# EAGLE board weather_4up (EAGLE 9.5.0), part 1 of 5
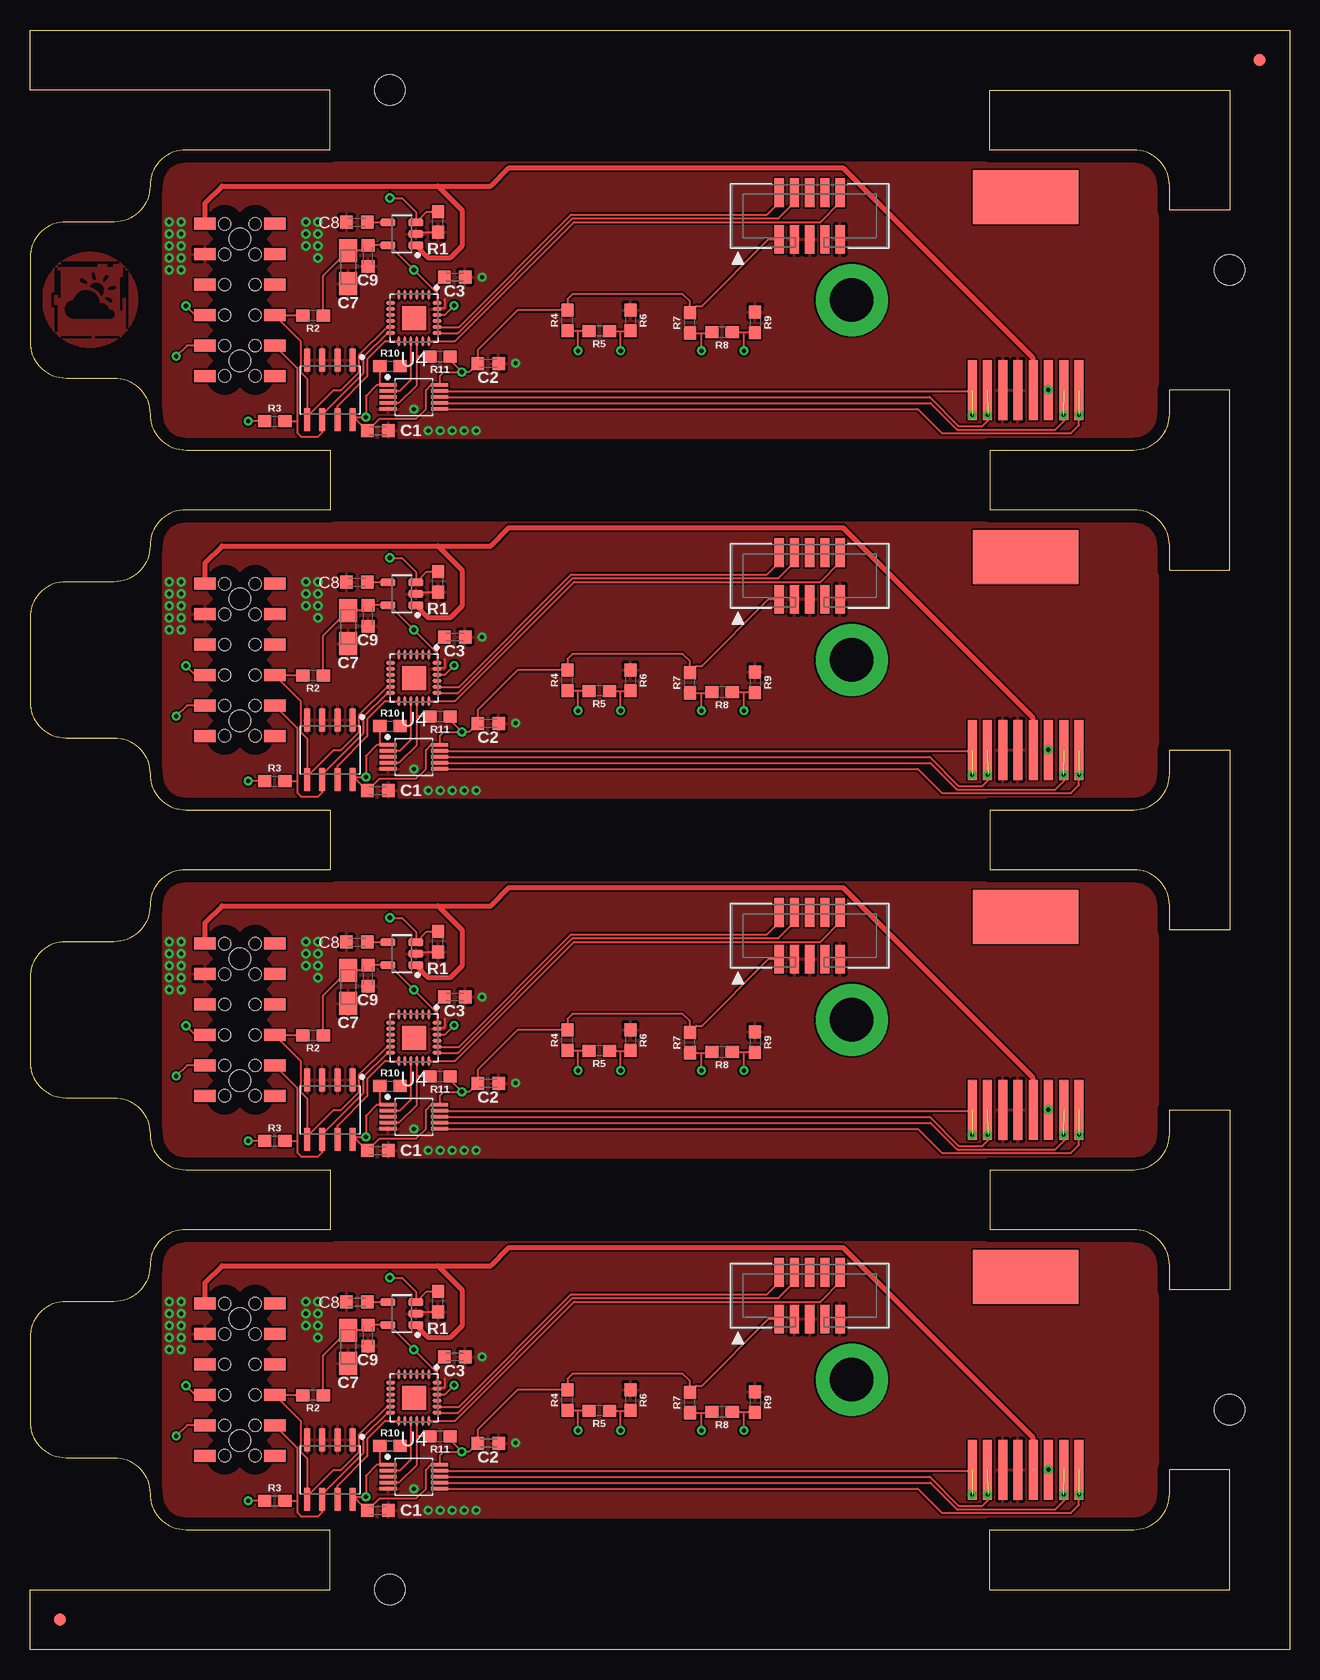
[diagram p0: board, top side]
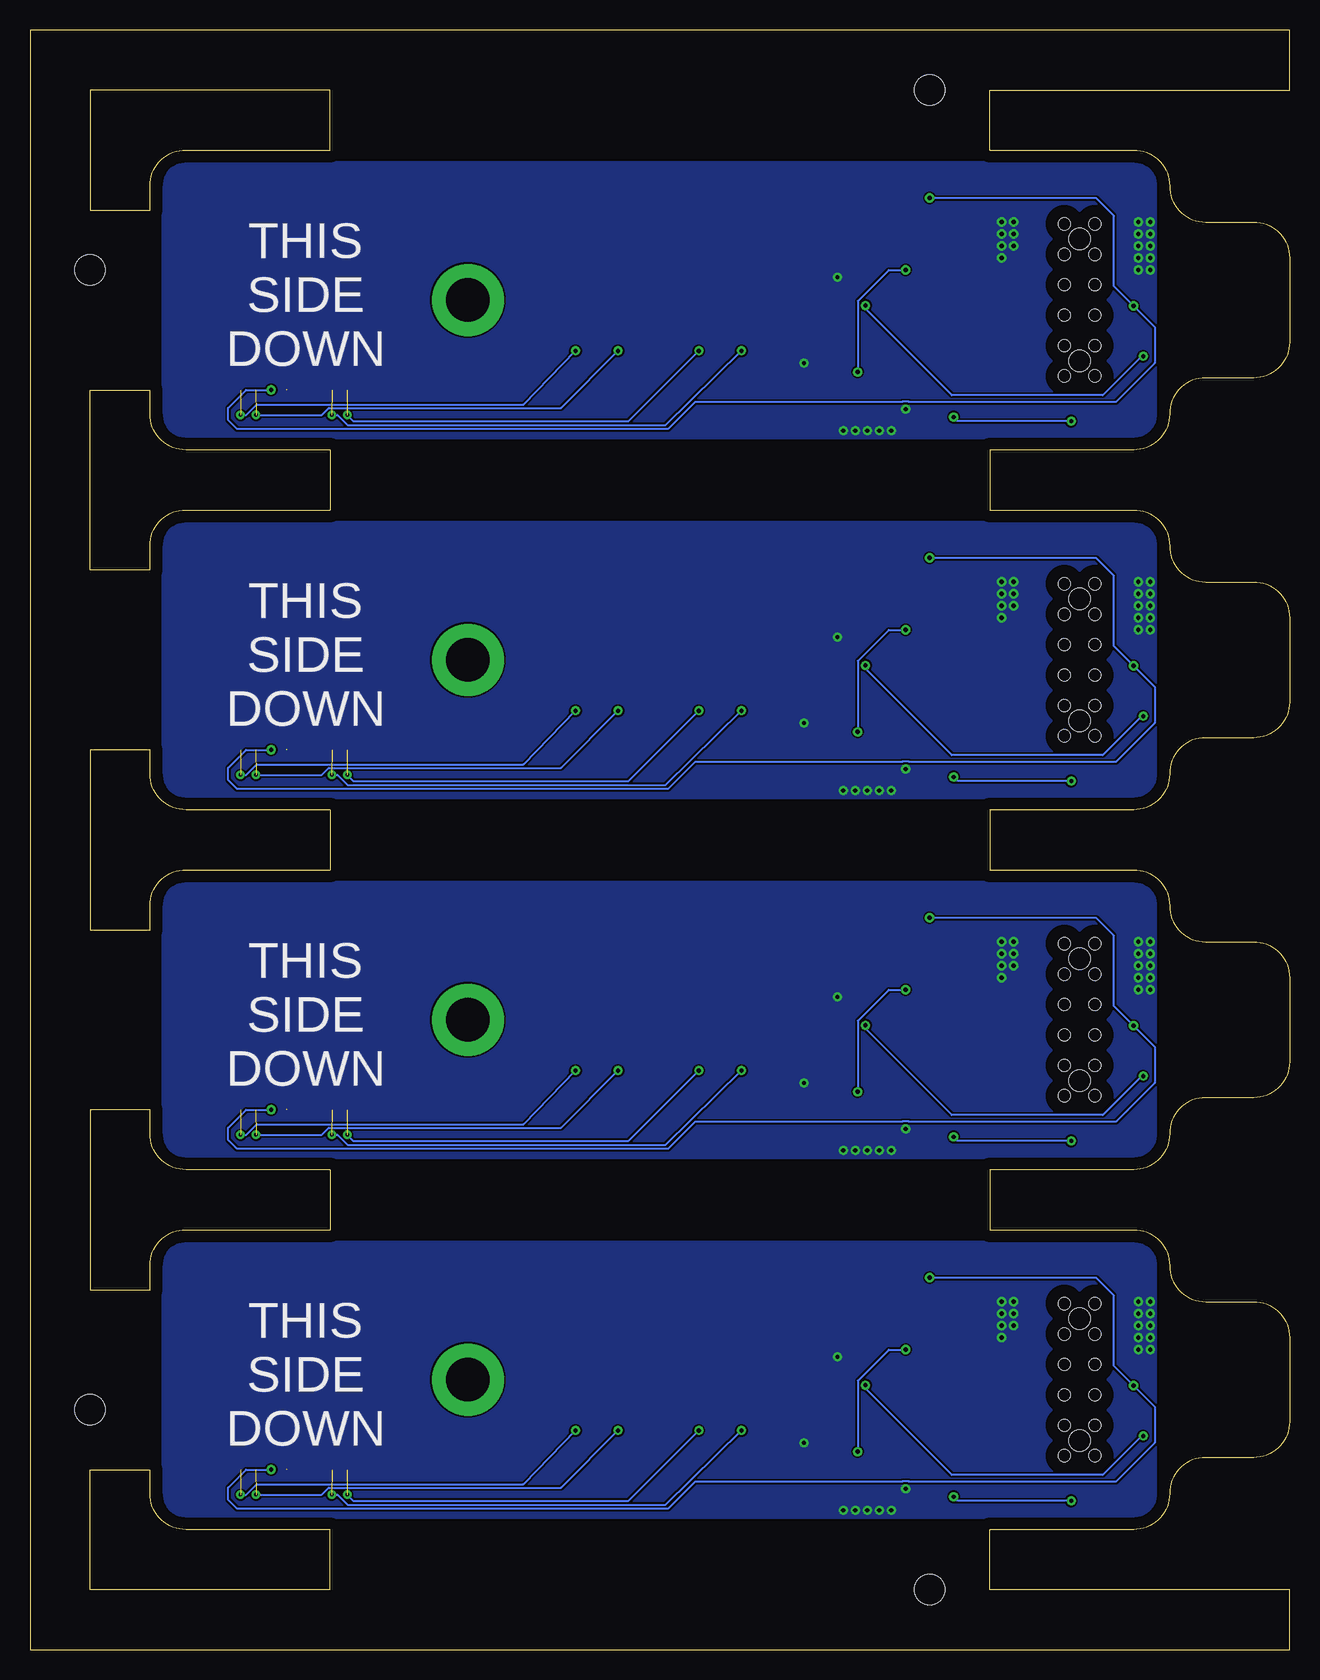
[diagram p1: board, bottom side, seen from below]

Size 105 x 135 mm. Coordinates in mm from the lower left corner, seen from the top.
Outline: 92,10 arc90 95,13 95,15 100,15 100,5 80,5 80,10 92,10
Outline: 95,32 arc90 92,35 80,35 80,40 92,40 arc90 95,43 95,45 100,45 100,30 95,30 95,32
Outline: 10,13 arc90 13,10 25,10 25,5 0,5 0,0 105,0 105,135 0,135 0,130 25,130 25,125 13,125 arc90 10,122 arc-90 7,119 3,119 arc90 0,116 0,109 arc90 3,106 7,106 arc-90 10,103 arc90 13,100 25,100 25,95 13,95 arc90 10,92 arc-90 7,89 3,89 arc90 0,86 0,79 arc90 3,76 7,76 arc-90 10,73 arc90 13,70 25,70 25,65 13,65 arc90 10,62 arc-90 7,59 3,59 arc90 0,56 0,49 arc90 3,46 7,46 arc-90 10,43 arc90 13,40 25,40 25,35 13,35 arc90 10,32 arc-90 7,29 3,29 arc90 0,26 0,19 arc90 3,16 7,16 arc-90 10,13
Outline: 95,62 arc90 92,65 80,65 80,70 92,70 arc90 95,73 95,75 100,75 100,60 95,60 95,62
Outline: 95,92 arc90 92,95 80,95 80,100 92,100 arc90 95,103 95,105 100,105 100,90 95,90 95,92
Outline: 95,122 arc90 92,125 80,125 80,130 100,130 100,120 95,120 95,122
Copper layers (1*16): Top 0.035mm / dielectric 1.5mm / Bottom 0.035mm
Design rules "default *": minimum track width 6mil, minimum drill 0.35mm, track to track 6mil, track to pad 6mil, pad to pad 6mil, via to via 6mil, smd to smd 6mil, copper to edge 40mil, drill to drill 6mil, minimum pad ring 10mil, minimum via ring 8mil, stop-mask expansion 4mil, vias tented up to drill 0.35mm, thermal gap 10mil
Holes 2.54 mm at 30,5 100,20 100,115 30,130

## Footprints (pad centres in the part's own frame; a part is rotated, then mirrored left to right if it is on the bottom)
C0603K = smd 1.05 x 1.08: 1 -0.875,0; 2 0.875,0
A/3216-18R = smd 1.95 x 1.5: + 1.375,0; - -1.375,0
FIDUCIAL_1MM = smd 1 x 1: 1 0,0
M20-7810645 = smd 1.02 x 1.78: P$1 -6.35,-2.91; P$2 -3.81,-2.91; P$3 -1.27,-2.91; P$4 1.27,-2.91; P$5 3.81,-2.91; P$6 6.35,-2.91; P$7 6.35,2.91; P$8 3.81,2.91; P$9 1.27,2.91; P$10 -1.27,2.91; P$11 -3.81,2.91; P$12 -6.35,2.91 | hole 1.02: -6.35,1.27; -3.81,1.27; -1.27,1.27; 1.27,1.27; 3.81,1.27; 6.35,1.27; 6.35,-1.27; 3.81,-1.27; 1.27,-1.27; -1.27,-1.27; -3.81,-1.27; -6.35,-1.27 | hole 1.8: -5.08,0; 5.08,0
85513-5009 = smd 0.76 x 5: 1 4.445,0; 2 3.175,0; 3 1.905,0; 4 0.635,0; 5 -0.635,0; 6 -1.905,0; 7 -3.175,0; 8 -4.445,0 | smd 8.8 x 4.5: P$1 0,16.05
0603 = smd 1.1 x 1: 1 -0.85,0; 2 0.85,0
QFN50P400X400X100-25T200 = smd 0.837 x 0.27: 1 -1.937,1.25; 2 -1.937,0.75; 3 -1.937,0.25; 4 -1.937,-0.25; 5 -1.937,-0.75; 6 -1.937,-1.25; 13 1.937,-1.25; 14 1.937,-0.75; 15 1.937,-0.25; 16 1.937,0.25; 17 1.937,0.75; 18 1.937,1.25 | smd 0.27 x 0.837: 7 -1.25,-1.937; 8 -0.75,-1.937; 9 -0.25,-1.937; 10 0.25,-1.937; 11 0.75,-1.937; 12 1.25,-1.937; 19 1.25,1.937; 20 0.75,1.937; 21 0.25,1.937; 22 -0.25,1.937; 23 -0.75,1.937; 24 -1.25,1.937 | smd 2 x 2: 25 0,0
SOIC127P600X175-8 = smd 1.968 x 0.569: 1 -2.473,1.905; 2 -2.473,0.635; 3 -2.473,-0.635; 4 -2.473,-1.905; 5 2.473,-1.905; 6 2.473,-0.635; 7 2.473,0.635; 8 2.473,1.905
SOP50P490X110-10 = smd 1.438 x 0.297: 1 -2.145,1; 2 -2.145,0.5; 3 -2.145,0; 4 -2.145,-0.5; 5 -2.145,-1; 6 2.145,-1; 7 2.145,-0.5; 8 2.145,0; 9 2.145,0.5; 10 2.145,1
SOT95P280X145-5 = smd 1.262 x 0.609: 1 -1.175,0.95; 2 -1.175,0; 3 -1.175,-0.95; 4 1.175,-0.95; 5 1.175,0.95
2X05_1.27MM_BOX_NOPOSTS = smd 0.76 x 2.4: 1 -2.54,-1.95; 2 -2.54,1.95; 3 -1.27,-1.95; 4 -1.27,1.95; 5 0,-1.95; 6 0,1.95; 7 1.27,-1.95; 8 1.27,1.95; 9 2.54,-1.95; 10 2.54,1.95

## Placement (x,y rotation side)
C1  .1uf  [C0603K]  29,101.6 0 top
C2  .1uf  [C0603K]  38.2,107.2 0 top
C3  .1uf  [C0603K]  35.4,114.4 0 top
C4  6.8uf  [A/3216-18R]  26.54,85.23 90 top
C5  [C0603K]  27.25,88.97 180 top
C6  .1uf  [C0603K]  28.17,86.17 270 top
C7  6.8uf  [A/3216-18R]  26.54,115.23 90 top
C8  [C0603K]  27.25,118.97 180 top
C9  .1uf  [C0603K]  28.17,116.17 270 top
C10  .1uf  [C0603K]  29,71.6 0 top
C11  .1uf  [C0603K]  38.2,77.2 0 top
C12  .1uf  [C0603K]  35.4,84.4 0 top
C13  6.8uf  [A/3216-18R]  26.54,55.23 90 top
C14  [C0603K]  27.25,58.97 180 top
C15  .1uf  [C0603K]  28.17,56.17 270 top
C16  .1uf  [C0603K]  29,41.6 0 top
C17  .1uf  [C0603K]  38.2,47.2 0 top
C18  .1uf  [C0603K]  35.4,54.4 0 top
C19  6.8uf  [A/3216-18R]  26.54,25.23 90 top
C20  [C0603K]  27.25,28.97 180 top
C21  .1uf  [C0603K]  28.17,26.18 270 top
C22  .1uf  [C0603K]  29,11.6 0 top
C23  .1uf  [C0603K]  38.2,17.2 0 top
C24  .1uf  [C0603K]  35.4,24.4 0 top
FID1  FIDUCIAL_1MM  [FIDUCIAL_1MM]  102.5,132.5 0 top
FID13  FIDUCIAL_1MM  [FIDUCIAL_1MM]  2.5,2.5 0 top
J1  2X6-HEADERS  [M20-7810645]  17.5,112.5 90 top
J2  95501-6889VERT  [85513-5009]  83,105 0 top
J3  2X6-HEADERS  [M20-7810645]  17.5,82.5 90 top
J4  95501-6889VERT  [85513-5009]  83,75 0 top
J5  2X6-HEADERS  [M20-7810645]  17.5,52.5 90 top
J6  95501-6889VERT  [85513-5009]  83,45 0 top
J7  2X6-HEADERS  [M20-7810645]  17.5,22.5 90 top
J8  95501-6889VERT  [85513-5009]  83,15 0 top
R1  100k  [0603]  34,119 90 top
R2  4.7k  [0603]  23.6,111.2 180 top
R3  4.7k  [0603]  20.4,102.4 0 top
R4  330  [0603]  44.8,110.8 90 top
R5  100  [0603]  47.46,109.89 180 top
R6  300  [0603]  50.06,110.79 270 top
R7  330  [0603]  55,110.6 90 top
R8  100  [0603]  57.69,109.79 180 top
R9  300  [0603]  60.45,110.62 270 top
R10  4.7k  [0603]  30.02,106.98 0 top
R11  4.7k  [0603]  34.18,107.76 180 top
R12  100k  [0603]  34,89 90 top
R13  4.7k  [0603]  23.6,81.2 180 top
R14  4.7k  [0603]  20.4,72.4 0 top
R15  330  [0603]  44.8,80.8 90 top
R16  100  [0603]  47.46,79.89 180 top
R17  300  [0603]  50.06,80.79 270 top
R18  330  [0603]  55,80.6 90 top
R19  100  [0603]  57.69,79.79 180 top
R20  300  [0603]  60.45,80.62 270 top
R21  4.7k  [0603]  30.02,76.98 0 top
R22  4.7k  [0603]  34.18,77.76 180 top
R23  100k  [0603]  34,59 90 top
R24  4.7k  [0603]  23.6,51.2 180 top
R25  4.7k  [0603]  20.4,42.4 0 top
R26  330  [0603]  44.8,50.8 90 top
R27  100  [0603]  47.46,49.9 180 top
R28  300  [0603]  50.06,50.79 270 top
R29  330  [0603]  55,50.6 90 top
R30  100  [0603]  57.69,49.79 180 top
R31  300  [0603]  60.45,50.62 270 top
R32  4.7k  [0603]  30.02,46.98 0 top
R33  4.7k  [0603]  34.18,47.76 180 top
R34  100k  [0603]  34,29 90 top
R35  4.7k  [0603]  23.6,21.2 180 top
R36  4.7k  [0603]  20.4,12.4 0 top
R37  330  [0603]  44.8,20.8 90 top
R38  100  [0603]  47.46,19.89 180 top
R39  300  [0603]  50.06,20.79 270 top
R40  330  [0603]  55,20.6 90 top
R41  100  [0603]  57.69,19.79 180 top
R42  300  [0603]  60.45,20.62 270 top
R43  4.7k  [0603]  30.02,16.98 0 top
R44  4.7k  [0603]  34.18,17.76 180 top
U1  ATSAMD09  [QFN50P400X400X100-25T200]  32,81 270 top
U2  ATSAMD09  [QFN50P400X400X100-25T200]  32,111 270 top
U3  M24C02-WMN6TP  [SOIC127P600X175-8]  25,105 270 top
U4  PCA9615  [SOP50P490X110-10]  32,104.4 0 top
U5  M24C02-WMN6TP  [SOIC127P600X175-8]  25,75 270 top
U6  PCA9615  [SOP50P490X110-10]  32,74.4 0 top
U7  ATSAMD09  [QFN50P400X400X100-25T200]  32,51 270 top
U8  M24C02-WMN6TP  [SOIC127P600X175-8]  25,45 270 top
U9  PCA9615  [SOP50P490X110-10]  32,44.4 0 top
U10  ATSAMD09  [QFN50P400X400X100-25T200]  32,21 270 top
U11  M24C02-WMN6TP  [SOIC127P600X175-8]  25,15 270 top
U12  PCA9615  [SOP50P490X110-10]  32,14.4 0 top
U$1  MIC5219-3.3YM5-TR  [SOT95P280X145-5]  31,88 180 top
U$2  MIC5219-3.3YM5-TR  [SOT95P280X145-5]  31,58 180 top
U$3  MIC5219-3.3YM5-TR  [SOT95P280X145-5]  31,28 180 top
U$4  MIC5219-3.3YM5-TR  [SOT95P280X145-5]  31,118 180 top
X1  [2X05_1.27MM_BOX_NOPOSTS]  65,119.5 0 top
X2  [2X05_1.27MM_BOX_NOPOSTS]  65,89.5 0 top
X3  [2X05_1.27MM_BOX_NOPOSTS]  65,59.5 0 top
X4  [2X05_1.27MM_BOX_NOPOSTS]  65,29.5 0 top

## Library data of the parts
C1-C24 = rcl; SPICEPREFIX: C
FID1 FID13 = microbuilder; BOM: EXCLUDE
J1-J8 U1-U12 U$1-U$4 = Conservify
R1-R44 = SparkFun-Resistors; PROD_ID: RES-07828
X1-X4 = microbuilder

## Nets
3V1: C4.+ C6.1 C10.1 C11.1 C12.1 R13.1 R14.1 R15.2 R18.2 R21.1 R22.1 U1.24 U5.8 U6.1 U6.10 U$1.5 X2.1
3V2: C13.+ C15.1 C16.1 C17.1 C18.1 R24.1 R25.1 R26.2 R29.2 R32.1 R33.1 U7.24 U8.8 U9.1 U9.10 U$2.5 X3.1
3V3: C1.1 C2.1 C3.1 C7.+ C9.1 R2.1 R3.1 R4.2 R7.2 R10.1 R11.1 U2.24 U3.8 U4.1 U4.10 U$4.5 X1.1
3V4: C19.+ C21.1 C22.1 C23.1 C24.1 R35.1 R36.1 R37.2 R40.2 R43.1 R44.1 U10.24 U11.8 U12.1 U12.10 U$3.5 X4.1
EN: U4.3
EN1: U6.3
EN2: U9.3
EN3: U12.3
ENABLE: J1.P$10 J2.3 R1.2 U$4.3
ENABLE1: J3.P$10 J4.3 R12.2 U$1.3
ENABLE2: J5.P$10 J6.3 R23.2 U$2.3
ENABLE3: J7.P$10 J8.3 R34.2 U$3.3
G1: J1.P$11 U2.22
G2: J1.P$12
G3: J3.P$11 U1.22
G4: J3.P$12
G5: J5.P$11 U7.22
G6: J5.P$12
G7: J7.P$11 U10.22
G8: J7.P$12
GND: C1.2 C2.2 C3.2 C7.- C8.2 C9.2 J1.P$8 J2.5 J2.6 R1.1 R6.1 R9.1 U2.23 U3.1 U3.2 U3.3 U3.4 U4.5 U$4.2 X1.3 X1.5 X1.9
GND2: C4.- C5.2 C6.2 C10.2 C11.2 C12.2 J3.P$8 J4.5 J4.6 R12.1 R17.1 R20.1 U1.23 U5.1 U5.2 U5.3 U5.4 U6.5 U$1.2 X2.3 X2.5 X2.9
GND4: C13.- C14.2 C15.2 C16.2 C17.2 C18.2 J5.P$8 J6.5 J6.6 R23.1 R28.1 R31.1 U7.23 U8.1 U8.2 U8.3 U8.4 U9.5 U$2.2 X3.3 X3.5 X3.9
GND6: C19.- C20.2 C21.2 C22.2 C23.2 C24.2 J7.P$8 J8.5 J8.6 R34.1 R39.1 R42.1 U10.23 U11.1 U11.2 U11.3 U11.4 U12.5 U$3.2 X4.3 X4.5 X4.9
IN3V1: J3.P$9
IN3V2: J5.P$9
IN3V3: J1.P$9
IN3V4: J7.P$9
KEY: X1.7
KEY1: X2.7
KEY2: X3.7
KEY3: X4.7
LCL-M: J2.1 R8.1 R9.2 U4.6
LCL-M1: J4.1 R19.1 R20.2 U6.6
LCL-M2: J6.1 R30.1 R31.2 U9.6
LCL-M3: J8.1 R41.1 R42.2 U12.6
LCL-P: J2.2 R7.1 R8.2 U4.7
LCL-P1: J4.2 R18.1 R19.2 U6.7
LCL-P2: J6.2 R29.1 R30.2 U9.7
LCL-P3: J8.2 R40.1 R41.2 U12.7
LDA-M: J2.8 R5.1 R6.2 U4.9
LDA-M1: J4.8 R16.1 R17.2 U6.9
LDA-M2: J6.8 R27.1 R28.2 U9.9
LDA-M3: J8.8 R38.1 R39.2 U12.9
LDA-P: J2.7 R4.1 R5.2 U4.8
LDA-P1: J4.7 R15.1 R16.2 U6.8
LDA-P2: J6.7 R26.1 R27.2 U9.8
LDA-P3: J8.7 R37.1 R38.2 U12.8
MISO: J1.P$4
MISO1: J3.P$4
MISO2: J5.P$4
MISO3: J7.P$4
MOSI: J1.P$5
MOSI1: J3.P$5
MOSI2: J5.P$5
MOSI3: J7.P$5
N$3: C5.1 U$1.4
N$5: C14.1 U$2.4
N$6: C8.1 U$4.4
N$8: C20.1 U$3.4
NC: J1.P$1
NC1: J3.P$1
NC2: J5.P$1
NC3: J7.P$1
RESET: U2.18 X1.10
RESET1: U1.18 X2.10
RESET2: U7.18 X3.10
RESET3: U10.18 X4.10
SCK: J1.P$6
SCK1: J3.P$6
SCK2: J5.P$6
SCK3: J7.P$6
SCL: J1.P$2 R3.2 U2.12 U3.6
SCL1: J3.P$2 R14.2 U1.12 U5.6
SCL2: J5.P$2 R25.2 U7.12 U8.6
SCL3: J7.P$2 R36.2 U10.12 U11.6
SDA: J1.P$3 R2.2 U2.11 U3.5
SDA1: J3.P$3 R13.2 U1.11 U5.5
SDA2: J5.P$3 R24.2 U7.11 U8.5
SDA3: J7.P$3 R35.2 U10.11 U11.5
SENSE-SCL: R11.2 U2.16 U4.4
SENSE-SCL1: R22.2 U1.16 U6.4
SENSE-SCL2: R33.2 U7.16 U9.4
SENSE-SCL3: R44.2 U10.16 U12.4
SENSE-SDA: R10.2 U2.15 U4.2
SENSE-SDA1: R21.2 U1.15 U6.2
SENSE-SDA2: R32.2 U7.15 U9.2
SENSE-SDA3: R43.2 U10.15 U12.2
SWCLK: U2.19 X1.4
SWCLK1: U1.19 X2.4
SWCLK2: U7.19 X3.4
SWCLK3: U10.19 X4.4
SWDIO: U2.20 X1.2
SWDIO1: U1.20 X2.2
SWDIO2: U7.20 X3.2
SWDIO3: U10.20 X4.2
SWO: X1.6
SWO1: X2.6
SWO2: X3.6
SWO3: X4.6
TDI: X1.8
TDI1: X2.8
TDI2: X3.8
TDI3: X4.8
UNREG: J1.P$7 J2.4 U$4.1
UNREG1: J3.P$7 J4.4 U$1.1
UNREG2: J5.P$7 J6.4 U$2.1
UNREG3: J7.P$7 J8.4 U$3.1
WC: U2.13 U3.7
WC1: U1.13 U5.7
WC2: U7.13 U8.7
WC3: U10.13 U11.7

## Tracks (layer width: path | path; a pad name or v marks a point on that pad's centre or on a via)
3V1  (via drill 0.35)
  Top 0.152: 33.94,83.06 v32,85 29.95,87.05 U$1.5 C6.1 27.73,86.61 C4.+ 24.45,84.52 R13.1 | 33.94,83.06 U1.24 | C12.1 33.94,83.81 33.94,83.06 | v36,76.49 36.62,76.49 C11.1 37.33,78.33 40.65,81.65 R15.2 44.8,82.58 45.23,83 54.4,83 55,82.4 R18.2 55.55,82 56,82 61.55,87.55 X2.1 | 27.2,72.53 C10.1 29.12,72.6 32.2,72.6 33,73.4 33,75 33.4,75.4 U6.10 34.2,75.45 34.2,76.2 34.49,76.49 v36,76.49 | 27.2,72.53 27,72.73 v28,72.73 28,74.49 28.91,75.4 29.22,75.4 | 27.2,72.53 U5.8 | R14.1 v18.2,72.4 | 29.22,75.4 U6.1 | R22.1 35.03,77.46 v36,76.49 | R21.1 29.17,75.46 29.22,75.4
  Bottom 0.152: v36,76.49 36,82.4 33.4,85 v32,85 | v18.2,72.4 27.67,72.4 v28,72.73
3V2  (via drill 0.35)
  Top 0.152: 33.94,53.06 v32,55 29.95,57.05 U$2.5 C15.1 27.73,56.61 C13.+ 24.45,54.52 R24.1 | 33.94,53.06 U7.24 | C18.1 33.94,53.81 33.94,53.06 | v36,46.49 36.62,46.49 C17.1 37.33,48.33 40.65,51.65 R26.2 44.8,52.58 45.23,53 54.4,53 55,52.4 R29.2 55.55,52 56,52 61.55,57.55 X3.1 | 27.2,42.53 C16.1 29.12,42.6 32.2,42.6 33,43.4 33,45 33.4,45.4 U9.10 34.2,45.45 34.2,46.2 34.49,46.49 v36,46.49 | 27.2,42.53 27,42.73 v28,42.73 28,44.49 28.91,45.4 29.22,45.4 | 27.2,42.53 U8.8 | R25.1 v18.2,42.4 | 29.22,45.4 U9.1 | R33.1 35.03,47.46 v36,46.49 | R32.1 29.17,45.46 29.22,45.4
  Bottom 0.152: v36,46.49 36,52.4 33.4,55 v32,55 | v18.2,42.4 27.67,42.4 v28,42.73
3V3  (via drill 0.35)
  Top 0.152: 33.94,113.06 v32,115 29.95,117.05 U$4.5 C9.1 27.73,116.61 C7.+ 24.45,114.52 R2.1 | 33.94,113.06 U2.24 | C3.1 33.94,113.81 33.94,113.06 | v36,106.49 36.62,106.49 C2.1 37.33,108.33 40.65,111.65 R4.2 44.8,112.58 45.23,113 54.4,113 55,112.4 R7.2 55.55,112 56,112 61.55,117.55 X1.1 | 27.2,102.53 C1.1 29.12,102.6 32.2,102.6 33,103.4 33,105 33.4,105.4 U4.10 34.2,105.45 34.2,106.2 34.49,106.49 v36,106.49 | 27.2,102.53 27,102.73 v28,102.73 28,104.49 28.91,105.4 29.22,105.4 | 27.2,102.53 U3.8 | R3.1 v18.2,102.4 | 29.22,105.4 U4.1 | R11.1 35.03,107.46 v36,106.49 | R10.1 29.17,105.46 29.22,105.4
  Bottom 0.152: v36,106.49 36,112.4 33.4,115 v32,115 | v18.2,102.4 27.67,102.4 v28,102.73
3V4  (via drill 0.35)
  Top 0.152: 33.94,23.06 v32,25 29.95,27.05 U$3.5 C21.1 27.73,26.61 C19.+ 24.45,24.52 R35.1 | 33.94,23.06 U10.24 | C24.1 33.94,23.81 33.94,23.06 | v36,16.49 36.62,16.49 C23.1 37.33,18.32 40.65,21.65 R37.2 44.8,22.57 45.23,23 54.4,23 55,22.4 R40.2 55.55,22 56,22 61.55,27.55 X4.1 | 27.2,12.53 C22.1 29.12,12.6 32.2,12.6 33,13.4 33,15 33.4,15.4 U12.10 34.2,15.46 34.2,16.2 34.49,16.49 v36,16.49 | 27.2,12.53 27,12.73 v28,12.73 28,14.49 28.91,15.4 29.22,15.4 | 27.2,12.53 U11.8 | R36.1 v18.2,12.4 | 29.22,15.4 U12.1 | R44.1 35.03,17.46 v36,16.49 | R43.1 29.17,15.46 29.22,15.4
  Bottom 0.152: v36,16.49 36,22.4 33.4,25 v32,25 | v18.2,12.4 27.67,12.4 v28,12.73
ENABLE  (via drill 0.35)
  Top 0.152: R1.2 33.08,119.85 U$4.3 32.17,119.83 31,121 v30,121 | J1.P$10 13.77,111.23 v13,112
  Bottom 0.152: v30,121 16.11,121 14.63,119.51 14.63,113.63 v13,112 11.25,110.25 11.25,107.25 14.5,104 31.74,104 31.75,104.01 32.25,104.01 32.26,104 49.55,104 51.8,101.75 87.75,101.75 88.5,102.5 88.5,103.5 87,105 J2.3
  other vias: 84.91,105
ENABLE1  (via drill 0.35)
  Top 0.152: R12.2 33.08,89.85 U$1.3 32.17,89.83 31,91 v30,91 | J3.P$10 13.77,81.23 v13,82
  Bottom 0.152: v30,91 16.11,91 14.63,89.51 14.63,83.63 v13,82 11.25,80.25 11.25,77.25 14.5,74 31.74,74 31.75,74.01 32.25,74.01 32.26,74 49.55,74 51.8,71.75 87.75,71.75 88.5,72.5 88.5,73.5 87,75 J4.3
  other vias: 84.91,75
ENABLE2  (via drill 0.35)
  Top 0.152: R23.2 33.08,59.85 U$2.3 32.17,59.83 31,61 v30,61 | J5.P$10 13.77,51.23 v13,52
  Bottom 0.152: v30,61 16.11,61 14.63,59.51 14.63,53.63 v13,52 11.25,50.25 11.25,47.25 14.5,44 31.74,44 31.75,44.01 32.25,44.01 32.26,44 49.55,44 51.8,41.75 87.75,41.75 88.5,42.5 88.5,43.5 87,45 J6.3
  other vias: 84.91,45
ENABLE3  (via drill 0.35)
  Top 0.152: R34.2 33.08,29.85 U$3.3 32.17,29.82 31,31 v30,31 | J7.P$10 13.77,21.23 v13,22
  Bottom 0.152: v30,31 16.11,31 14.63,29.51 14.63,23.63 v13,22 11.25,20.25 11.25,17.25 14.5,14 31.74,14 31.75,14.01 32.25,14.01 32.26,14 49.55,14 51.8,11.75 87.75,11.75 88.5,12.5 88.5,13.5 87,15 J8.3
  other vias: 84.91,15
G1  (via drill 0.35)
  Top 0.152: J1.P$11 13.09,108.69 v12.2,107.8 | v35.36,112.04 34.58,111.25 U2.22
  Bottom 0.152: v12.2,107.8 12.31,107.8 15.57,104.55 28.15,104.55 35.36,111.76 v35.36,112.04
G3  (via drill 0.35)
  Top 0.152: J3.P$11 13.09,78.69 v12.2,77.8 | v35.36,82.04 34.58,81.25 U1.22
  Bottom 0.152: v12.2,77.8 12.31,77.8 15.57,74.55 28.15,74.55 35.36,81.76 v35.36,82.04
G5  (via drill 0.35)
  Top 0.152: J5.P$11 13.09,48.69 v12.2,47.8 | v35.36,52.04 34.58,51.25 U7.22
  Bottom 0.152: v12.2,47.8 12.31,47.8 15.57,44.55 28.15,44.55 35.36,51.76 v35.36,52.04
G7  (via drill 0.35)
  Top 0.152: J7.P$11 13.09,18.69 v12.2,17.8 | v35.36,22.04 34.58,21.25 U10.22
  Bottom 0.152: v12.2,17.8 12.31,17.8 15.57,14.55 28.15,14.55 35.36,21.76 v35.36,22.04
GND  (via drill 0.35)
  Top 0.152: U$4.2 32.33,118.15 R1.1 | U2.23 33.99,111.8 34.48,111.8 34.6,111.92 34.6,112.6
  other vias: 23,119 24,119 24,118 23,118 24,117 23,117 24,116 11.6,119 11.6,118 11.6,117 11.6,116 11.6,115 12.6,119 12.6,118 12.6,117 12.6,116 12.6,115 32,103.4 37.2,101.6 33.2,101.6 34.2,101.6 35.2,101.6 36.2,101.6 37.68,114.39 40.47,107.22
  pour Top: 11.1,124 94,124 94,101 11.1,101
  pour Bottom: 11.1,124 94,124 94,101 11.1,101
GND1
  pour Top (rank 3): 6.94,114.7 6.95,114.44 7.2,114.44 7.2,114.7
  pour Top (rank 3): 6.94,114.19 6.95,113.93 7.2,113.93 7.2,114.19
  pour Top (rank 3): 7.11,113.67 7.14,113.64 7.16,113.62 7.18,113.58 7.18,113.55 7.18,113.51 7.18,113.48 7.17,113.46 7.16,113.44 7.14,113.41 7.2,113.41 7.2,113.67 7.11,113.67
  pour Top (rank 3): 6.94,114.45 6.95,114.19 7.2,114.19 7.2,114.44
  pour Top (rank 3): 6.94,113.7 6.97,113.7 6.99,113.71 7.03,113.7 7.05,113.7 7.07,113.69 7.09,113.69 7.11,113.67 7.2,113.67 7.2,113.93 6.95,113.93
  pour Top (rank 3): 2.55,112.64 2.55,112.38 2.81,112.38 2.81,112.64
  pour Top (rank 3): 5.14,110.05 5.14,109.79 5.39,109.79 5.39,110.05
  pour Top (rank 3): 2.55,111.34 2.55,111.08 2.81,111.08 2.81,111.34
  pour Top (rank 3): 3.58,114.96 3.59,114.7 3.84,114.7 3.84,114.96
  pour Top (rank 3): 3.84,114.96 3.84,114.7 4.1,114.7 4.1,114.96
  pour Top (rank 3): 2.55,111.6 2.55,111.34 2.81,111.34 2.81,111.6
  pour Top (rank 3): 2.55,111.86 2.55,111.6 2.81,111.6 2.81,111.86
  pour Top (rank 3): 3.07,114.96 3.07,114.7 3.33,114.7 3.33,114.96
  pour Top (rank 3): 4.1,114.96 4.1,114.7 4.36,114.7 4.36,114.96
  pour Top (rank 3): 3.33,114.96 3.33,114.7 3.58,114.7 3.58,114.96
  pour Top (rank 3): 2.55,112.38 2.55,112.12 2.81,112.12 2.81,112.38
  pour Top (rank 3): 2.55,112.12 2.55,111.86 2.81,111.86 2.81,112.12
  pour Top (rank 3): 4.36,114.96 4.36,114.7 4.62,114.7 4.62,114.96
  pour Top (rank 3): 5.65,114.96 5.65,114.7 5.91,114.7 5.91,114.96
  pour Top (rank 3): 5.91,114.96 5.91,114.7 6.17,114.7 6.17,114.96
  pour Top (rank 3): 6.17,114.96 6.17,114.7 6.43,114.7 6.43,114.96
  pour Top (rank 3): 6.69,114.96 6.69,114.7 6.94,114.7 6.94,114.96
  pour Top (rank 3): 6.43,114.96 6.43,114.7 6.69,114.7 6.69,114.96
  pour Top (rank 3): 5.4,114.78 5.41,114.77 5.42,114.74 5.43,114.73 5.44,114.7 5.65,114.7 5.65,114.96 5.39,114.96 5.39,114.78
  pour Top (rank 3): 5.1,114.7 5.12,114.74 5.14,114.76 5.14,114.96 4.88,114.96 4.88,114.7
  pour Top (rank 3): 6.94,114.96 6.95,114.7 7.2,114.7 7.2,114.96
  pour Top (rank 3): 4.62,114.96 4.62,114.7 4.88,114.7 4.88,114.96
  pour Top (rank 3): 5.14,114.76 5.16,114.79 5.19,114.81 5.23,114.82 5.26,114.83 5.3,114.83 5.32,114.82 5.34,114.82 5.36,114.8 5.38,114.8 5.39,114.78 5.39,114.96 5.14,114.96
  pour Top (rank 3): 7.46,111.34 7.46,111.08 7.72,111.08 7.72,111.34
  pour Top (rank 3): 3.07,110.05 3.07,109.79 3.33,109.79 3.33,110.05
  pour Top (rank 3): 7.14,113.41 7.12,113.39 7.11,113.38 7.08,113.36 7.06,113.36 7.03,113.35 6.95,113.34 6.94,113.15 7.2,113.15 7.2,113.41 7.14,113.41
  pour Top (rank 3): 2.55,110.05 2.55,109.79 2.81,109.79 2.81,110.05
  pour Top (rank 3): 3.33,110.05 3.33,109.79 3.58,109.79 3.58,110.05
  pour Top (rank 3): 4.62,110.57 4.62,110.31 4.88,110.31 4.88,110.57
  pour Top (rank 3): 4.36,110.57 4.36,110.31 4.62,110.31 4.62,110.57
  pour Top (rank 3): 2.81,114.96 2.81,114.7 3.07,114.7 3.07,114.96
  pour Top (rank 3): 2.55,110.31 2.55,110.05 2.81,110.05 2.81,110.31
  pour Top (rank 3): 2.55,110.83 2.55,110.57 2.81,110.57 2.81,110.83
  pour Top (rank 3): 2.55,110.57 2.55,110.31 2.81,110.31 2.81,110.57
  pour Top (rank 3): 3.84,110.05 3.84,109.79 4.1,109.79 4.1,110.05
  pour Top (rank 3): 4.88,110.05 4.88,109.79 5.13,109.79 5.13,110.05
  pour Top (rank 3): 3.84,110.57 3.84,110.31 4.1,110.31 4.1,110.57
  pour Top (rank 3): 4.1,110.57 4.1,110.31 4.36,110.31 4.36,110.57
  pour Top (rank 3): 4.62,110.05 4.62,109.79 4.88,109.79 4.88,110.05
  pour Top (rank 3): 3.58,110.57 3.59,110.31 3.84,110.31 3.84,110.57
  pour Top (rank 3): 3.33,110.57 3.33,110.31 3.58,110.31 3.58,110.57
  pour Top (rank 3): 3.58,110.05 3.59,109.79 3.84,109.79 3.84,110.05
  pour Top (rank 3): 4.36,110.05 4.36,109.79 4.62,109.79 4.62,110.05
  pour Top (rank 3): 4.88,110.57 4.88,110.31 5.13,110.31 5.13,110.57
  pour Top (rank 3): 4.1,110.05 4.1,109.79 4.36,109.79 4.36,110.05
  pour Top (rank 3): 2.81,110.05 2.81,109.79 3.07,109.79 3.07,110.05
  pour Top (rank 3): 6.94,112.12 6.95,111.86 7.2,111.86 7.2,112.12
  pour Top (rank 3): 6.94,112.38 6.95,112.12 7.2,112.12 7.2,112.38
  pour Top (rank 3): 6.97,111.59 6.99,111.57 7.02,111.53 7.05,111.48 7.07,111.43 7.08,111.4 7.08,111.38 7.09,111.34 7.2,111.34 7.2,111.6 6.96,111.6
  pour Top (rank 3): 6.94,111.62 6.96,111.6 7.2,111.6 7.2,111.86 6.95,111.86
  pour Top (rank 3): 5.14,110.57 5.14,110.31 5.39,110.31 5.39,110.57
  pour Top (rank 3): 6.94,113.15 6.95,112.89 7.2,112.89 7.2,113.15
  pour Top (rank 3): 7.09,111.33 7.09,111.3 7.08,111.25 7.07,111.19 7.05,111.14 7.04,111.12 7.02,111.08 7.2,111.08 7.2,111.34 7.09,111.34
  pour Top (rank 3): 6.94,112.89 6.95,112.64 7.2,112.64 7.2,112.89
  pour Top (rank 3): 6.94,112.64 6.95,112.38 7.2,112.38 7.2,112.64
  pour Top (rank 3): 3.07,110.57 3.07,110.31 3.33,110.31 3.33,110.57
  pour Top (rank 3): 2.55,111.08 2.55,110.83 2.81,110.83 2.81,111.08
  pour Top (rank 3): 6.17,110.57 6.17,110.31 6.43,110.31 6.43,110.57
  pour Top (rank 3): 5.65,110.57 5.65,110.31 5.91,110.31 5.91,110.57
  pour Top (rank 3): 5.91,110.57 5.91,110.31 6.17,110.31 6.17,110.57
  pour Top (rank 3): 7.01,111.07 6.97,111.03 6.94,111.01 6.94,110.83 7.2,110.83 7.2,111.08 7.02,111.08
  pour Top (rank 3): 5.39,110.57 5.39,110.31 5.65,110.31 5.65,110.57
  pour Top (rank 3): 6.94,110.83 6.95,110.57 7.2,110.57 7.2,110.83
  pour Top (rank 3): 6.43,110.57 6.43,110.31 6.69,110.31 6.69,110.57
  pour Top (rank 3): 6.94,110.57 6.95,110.31 7.2,110.31 7.2,110.57
  pour Top (rank 3): 6.69,110.57 6.69,110.31 6.94,110.31 6.94,110.57
  pour Top (rank 3): 4.62,110.31 4.62,110.05 4.88,110.05 4.88,110.31
  pour Top (rank 3): 6.94,110.05 6.95,109.79 7.2,109.79 7.2,110.05
  pour Top (rank 3): 7.2,112.89 7.2,112.64 7.46,112.64 7.46,112.89
  pour Top (rank 3): 7.2,112.64 7.2,112.38 7.46,112.38 7.46,112.64
  pour Top (rank 3): 7.2,112.12 7.2,111.86 7.46,111.86 7.46,112.12
  pour Top (rank 3): 7.2,112.38 7.2,112.12 7.46,112.12 7.46,112.38
  pour Top (rank 3): 7.2,113.67 7.2,113.41 7.46,113.41 7.46,113.67
  pour Top (rank 3): 7.2,114.19 7.2,113.93 7.46,113.93 7.46,114.19
  pour Top (rank 3): 7.2,114.45 7.2,114.19 7.46,114.19 7.46,114.44
  pour Top (rank 3): 7.2,113.93 7.2,113.67 7.46,113.67 7.46,113.93
  pour Top (rank 3): 7.2,111.86 7.2,111.6 7.46,111.6 7.46,111.86
  pour Top (rank 3): 7.2,113.41 7.2,113.15 7.46,113.15 7.46,113.41
  pour Top (rank 3): 7.2,113.15 7.2,112.89 7.46,112.89 7.46,113.15
  pour Top (rank 3): 3.33,115.22 3.33,114.96 3.58,114.96 3.58,115.22
  pour Top (rank 3): 7.46,110.83 7.46,110.57 7.72,110.57 7.72,110.83
  pour Top (rank 3): 7.46,110.57 7.46,110.31 7.72,110.31 7.72,110.57
  pour Top (rank 3): 2.55,115.22 2.55,114.96 2.81,114.96 2.81,115.22
  pour Top (rank 3): 3.07,115.22 3.07,114.96 3.33,114.96 3.33,115.22
  pour Top (rank 3): 7.2,111.6 7.2,111.34 7.46,111.34 7.46,111.6
  pour Top (rank 3): 7.46,110.31 7.46,110.05 7.72,110.05 7.72,110.31
  pour Top (rank 3): 7.2,111.08 7.2,110.83 7.46,110.83 7.46,111.08
  pour Top (rank 3): 7.2,111.34 7.2,111.08 7.46,111.08 7.46,111.34
  pour Top (rank 3): 7.2,110.05 7.2,109.79 7.46,109.79 7.46,110.05
  pour Top (rank 3): 7.46,110.05 7.46,109.79 7.72,109.79 7.72,110.05
  pour Top (rank 3): 2.81,115.22 2.81,114.96 3.07,114.96 3.07,115.22
  pour Top (rank 3): 7.2,114.7 7.2,114.44 7.46,114.44 7.46,114.7
  pour Top (rank 3): 4.88,115.22 4.88,114.96 5.13,114.96 5.13,115.22
  pour Top (rank 3): 7.2,115.22 7.2,114.96 7.46,114.96 7.46,115.22
  pour Top (rank 3): 5.39,115.22 5.39,114.96 5.65,114.96 5.65,115.22
  pour Top (rank 3): 5.14,115.22 5.14,114.96 5.39,114.96 5.39,115.22
  pour Top (rank 3): 7.2,114.96 7.2,114.7 7.46,114.7 7.46,114.96
  pour Top (rank 3): 6.17,115.22 6.17,114.96 6.43,114.96 6.43,115.22
  pour Top (rank 3): 5.65,115.22 5.65,114.96 5.91,114.96 5.91,115.22
  pour Top (rank 3): 6.69,115.22 6.69,114.96 6.94,114.96 6.94,115.22
  pour Top (rank 3): 6.43,115.22 6.43,114.96 6.69,114.96 6.69,115.22
  pour Top (rank 3): 6.94,115.22 6.95,114.96 7.2,114.96 7.2,115.22
  pour Top (rank 3): 5.65,110.05 5.65,109.79 5.91,109.79 5.91,110.05
  pour Top (rank 3): 5.91,110.05 5.91,109.79 6.17,109.79 6.17,110.05
  pour Top (rank 3): 6.69,110.05 6.69,109.79 6.94,109.79 6.94,110.05
  pour Top (rank 3): 6.17,110.05 6.17,109.79 6.43,109.79 6.43,110.05
  pour Top (rank 3): 4.62,115.22 4.62,114.96 4.88,114.96 4.88,115.22
  pour Top (rank 3): 5.39,110.05 5.39,109.79 5.65,109.79 5.65,110.05
  pour Top (rank 3): 6.43,110.05 6.43,109.79 6.69,109.79 6.69,110.05
  pour Top (rank 3): 3.58,115.22 3.59,114.96 3.84,114.96 3.84,115.22
  pour Top (rank 3): 4.1,115.22 4.1,114.96 4.36,114.96 4.36,115.22
  pour Top (rank 3): 2.81,114.7 2.81,114.44 3.07,114.44 3.07,114.7
  pour Top (rank 3): 3.84,115.22 3.84,114.96 4.1,114.96 4.1,115.22
  pour Top (rank 3): 4.36,115.22 4.36,114.96 4.62,114.96 4.62,115.22
  pour Top (rank 3): 2.81,110.83 2.81,110.57 3.07,110.57 3.07,110.83
  pour Top (rank 3): 2.55,113.15 2.55,112.89 2.81,112.89 2.81,113.15
  pour Top (rank 3): 2.55,112.89 2.55,112.64 2.81,112.64 2.81,112.89
  pour Top (rank 3): 3.07,111.19 3.04,111.23 3.01,111.27 2.99,111.3 2.96,111.34 2.81,111.34 2.81,111.09 3.07,111.08
  pour Top (rank 3): 2.81,111.08 2.81,110.83 3.07,110.83 3.07,111.08
  pour Top (rank 3): 2.55,114.19 2.55,113.93 2.81,113.93 2.81,114.19
  pour Top (rank 3): 2.95,111.37 2.92,111.44 2.91,111.47 2.89,111.55 2.88,111.6 2.81,111.6 2.81,111.34 2.96,111.34
  pour Top (rank 3): 2.55,113.93 2.55,113.67 2.81,113.67 2.81,113.93
  pour Top (rank 3): 2.55,113.67 2.55,113.41 2.81,113.41 2.81,113.67
  pour Top (rank 3): 2.55,113.41 2.55,113.15 2.81,113.15 2.81,113.41
  pour Top (rank 3): 7.46,111.08 7.46,110.83 7.72,110.83 7.72,111.08
  pour Top (rank 3): 2.89,111.86 2.9,111.93 2.93,112 2.96,112.07 2.99,112.12 2.81,112.12 2.81,111.86 2.89,111.86
  pour Top (rank 3): 2.81,113.93 2.81,113.67 3.07,113.67 3.07,113.93
  pour Top (rank 3): 2.87,111.63 2.87,111.71 2.87,111.75 2.87,111.79 2.89,111.86 2.81,111.86 2.81,111.6 2.88,111.6
  pour Top (rank 3): 2.81,113.67 2.81,113.41 3.07,113.41 3.07,113.67
  pour Top (rank 3): 2.81,114.19 2.81,113.93 3.07,113.93 3.07,114.19
  pour Top (rank 3): 2.81,114.45 2.81,114.19 3.07,114.19 3.07,114.44
  pour Top (rank 3): 2.81,113.41 2.81,113.15 3.07,113.15 3.07,113.41
  pour Top (rank 3): 2.55,114.45 2.55,114.19 2.81,114.19 2.81,114.44
  pour Top (rank 3): 3,112.13 3.04,112.19 3.07,112.23 3.07,112.38 2.81,112.38 2.81,112.12 2.99,112.12
  pour Top (rank 3): 2.81,112.89 2.81,112.64 3.07,112.64 3.07,112.89
  pour Top (rank 3): 2.81,113.15 2.81,112.89 3.07,112.89 3.07,113.15
  pour Top (rank 3): 2.81,112.64 2.81,112.38 3.07,112.38 3.07,112.64
  pour Top (rank 3): 6.94,110.31 6.95,110.05 7.2,110.05 7.2,110.31
  pour Top (rank 3): 6.17,110.31 6.17,110.05 6.43,110.05 6.43,110.31
  pour Top (rank 3): 5.91,110.31 5.91,110.05 6.17,110.05 6.17,110.31
  pour Top (rank 3): 6.43,110.31 6.43,110.05 6.69,110.05 6.69,110.31
  pour Top (rank 3): 5.65,110.31 5.65,110.05 5.91,110.05 5.91,110.31
  pour Top (rank 3): 5.39,110.31 5.39,110.05 5.65,110.05 5.65,110.31
  pour Top (rank 3): 7.2,110.31 7.2,110.05 7.46,110.05 7.46,110.31
  pour Top (rank 3): 7.2,110.83 7.2,110.57 7.46,110.57 7.46,110.83
  pour Top (rank 3): 7.2,110.57 7.2,110.31 7.46,110.31 7.46,110.57
  pour Top (rank 3): 2.55,114.7 2.55,114.44 2.81,114.44 2.81,114.7
  pour Top (rank 3): 6.69,110.31 6.69,110.05 6.94,110.05 6.94,110.31
  pour Top (rank 3): 2.55,114.96 2.55,114.7 2.81,114.7 2.81,114.96
  pour Top (rank 3): 5.14,110.31 5.14,110.05 5.39,110.05 5.39,110.31
  pour Top (rank 3): 3.58,110.31 3.59,110.05 3.84,110.05 3.84,110.31
  pour Top (rank 3): 3.33,110.31 3.33,110.05 3.58,110.05 3.58,110.31
  pour Top (rank 3): 3.07,110.31 3.07,110.05 3.33,110.05 3.33,110.31
  pour Top (rank 3): 4.88,110.31 4.88,110.05 5.13,110.05 5.13,110.31
  pour Top (rank 3): 2.81,110.31 2.81,110.05 3.07,110.05 3.07,110.31
  pour Top (rank 3): 2.81,110.57 2.81,110.31 3.07,110.31 3.07,110.57
  pour Top (rank 3): 4.36,110.31 4.36,110.05 4.62,110.05 4.62,110.31
  pour Top (rank 3): 5.91,115.22 5.91,114.96 6.17,114.96 6.17,115.22
  pour Top (rank 3): 4.1,110.31 4.1,110.05 4.36,110.05 4.36,110.31
  pour Top (rank 3): 3.84,110.31 3.84,110.05 4.1,110.05 4.1,110.31
  pour Top (rank 3): 5.45,114.68 5.48,114.45 5.65,114.45 5.65,114.7 5.44,114.7
  pour Top (rank 3): 6.17,110.91 6.17,110.83 6.43,110.83 6.43,110.91
  pour Top (rank 3): 4.62,110.91 4.62,110.83 4.62,110.83 4.88,110.83 4.88,110.83 4.88,110.91
  pour Top (rank 3): 5.91,110.91 5.91,110.83 6.17,110.83 6.17,110.83 6.17,110.91
  pour Top (rank 3): 5.39,110.91 5.39,110.83 5.65,110.83 5.65,110.91 5.65,110.91
  pour Top (rank 3): 5.14,110.91 5.14,110.83 5.39,110.83 5.39,110.91
  pour Top (rank 3): 4.88,110.91 4.88,110.83 5.14,110.83 5.14,110.91 5.13,110.91
  pour Top (rank 3): 5.65,110.91 5.65,110.83 5.91,110.83 5.91,110.91
  pour Top (rank 3): 4.1,113.67 4.1,113.41 4.36,113.41 4.36,113.67
  pour Top (rank 3): 5.91,112.28 5.97,112.28 6.04,112.27 6.1,112.26 6.17,112.23 6.17,112.38 5.91,112.38
  pour Top (rank 3): 6.43,110.83 6.68,110.83 6.69,110.91 6.43,110.91
  pour Top (rank 3): 5.91,112.64 5.91,112.38 6.17,112.38 6.17,112.64
  pour Top (rank 3): 6.05,112.89 6.03,112.87 5.99,112.83 5.96,112.79 5.94,112.78 5.91,112.83 5.91,112.64 5.91,112.64 6.17,112.64 6.17,112.89 6.05,112.89
  pour Top (rank 3): 6.16,113.11 6.14,113.04 6.11,112.99 6.09,112.95 6.05,112.89 6.17,112.89 6.17,113.14
  pour Top (rank 3): 5.38,113.11 5.39,113.1 5.39,113.15 5.33,113.15
  pour Top (rank 3): 5.14,113.41 5.14,113.51 5.08,113.53 5,113.55 4.92,113.57 4.94,113.61 4.98,113.67 4.88,113.67 4.88,113.41
  pour Top (rank 3): 5.87,112.89 5.65,112.89 5.65,112.81 5.69,112.75 5.71,112.7 5.74,112.64 5.91,112.64 5.91,112.83 5.9,112.85
  pour Top (rank 3): 4.62,113.67 4.62,113.41 4.88,113.41 4.88,113.67
  pour Top (rank 3): 5.76,112.6 5.77,112.55 5.79,112.5 5.81,112.45 5.82,112.38 5.91,112.38 5.91,112.64 5.74,112.64
  pour Top (rank 3): 4.36,113.67 4.36,113.41 4.62,113.41 4.62,113.67
  pour Top (rank 3): 3.84,110.91 3.84,110.83 3.84,110.83 4.1,110.83 4.1,110.91
  pour Top (rank 3): 4.36,110.91 4.36,110.83 4.36,110.83 4.62,110.83 4.62,110.91 4.62,110.91
  pour Top (rank 3): 4.1,110.91 4.1,110.83 4.1,110.83 4.36,110.83 4.36,110.91
  pour Top (rank 3): 3.66,110.91 3.58,110.92 3.58,110.83 3.84,110.83 3.84,110.91
  pour Top (rank 3): 4.16,113.22 4.2,113.24 4.24,113.26 4.33,113.29 4.36,113.3 4.36,113.41 4.1,113.41 4.1,113.18
  pour Top (rank 3): 7.56,115.6 7.46,115.67 7.46,115.48 7.69,115.48
  pour Top (rank 3): 7.84,109.67 7.95,109.79 7.72,109.79 7.72,109.56
  pour Top (rank 3): 6.21,114.45 6.17,114.45 6.17,114.37
  pour Top (rank 3): 6.55,114.43 6.55,114.4 6.54,114.39 6.53,114.36 6.43,114.23 6.43,114.19 6.69,114.19 6.69,114.45 6.56,114.45
  pour Top (rank 3): 6.43,114.19 6.43,113.93 6.69,113.93 6.69,114.19
  pour Top (rank 3): 2.29,112.64 2.29,112.38 2.55,112.38 2.55,112.64
  pour Top (rank 3): 6.08,114.19 6.17,114.37 6.17,114.45 5.91,114.45 5.91,114.19
  pour Top (rank 3): 2.55,115.67 2.46,115.6 2.32,115.48 2.55,115.48
  pour Top (rank 3): 5.65,114.45 5.65,114.19 5.91,114.19 5.91,114.44
  pour Top (rank 3): 3.61,112.55 3.64,112.64 3.64,112.64 3.58,112.64 3.58,112.5 3.6,112.51
  pour Top (rank 3): 5.51,114.26 5.51,114.24 5.51,114.22 5.5,114.21 5.49,114.19 5.65,114.19 5.65,114.45 5.49,114.45
  pour Top (rank 3): 7.95,115.22 7.84,115.34 7.72,115.45 7.72,115.22
  pour Top (rank 3): 5.32,113.43 5.24,113.47 5.16,113.5 5.14,113.51 5.14,113.41 5.35,113.41
  pour Top (rank 3): 6.43,112.77 6.69,112.65 6.69,112.89 6.43,112.89
  pour Top (rank 3): 6.57,111.84 6.6,111.77 6.61,111.71 6.68,111.71 6.69,111.86 6.56,111.86
  pour Top (rank 3): 4.36,113.94 4.36,113.93 4.38,113.93
  pour Top (rank 3): 5.14,114.51 5.14,114.45 5.16,114.45
  pour Top (rank 3): 6.43,112.06 6.47,112.01 6.51,111.95 6.54,111.9 6.56,111.86 6.69,111.86 6.69,112.12 6.43,112.12
  pour Top (rank 3): 6.87,113.67 6.69,113.67 6.69,113.61
  pour Top (rank 3): 6.43,113.93 6.43,113.67 6.69,113.67 6.69,113.93
  pour Top (rank 3): 6.43,113.41 6.48,113.41 6.47,113.45 6.47,113.46 6.48,113.48 6.49,113.5 6.5,113.52 6.51,113.54 6.52,113.55 6.54,113.56 6.56,113.57 6.69,113.61 6.69,113.67 6.43,113.67
  pour Top (rank 3): 6.43,113.15 6.43,112.89 6.69,112.89 6.69,113.15
  pour Top (rank 3): 6.61,113.31 6.59,113.31 6.56,113.31 6.54,113.33 6.52,113.34 6.51,113.35 6.49,113.37 6.48,113.39 6.48,113.41 6.43,113.41 6.43,113.15 6.68,113.15 6.69,113.31
  pour Top (rank 3): 6.43,114.23 6.39,114.19 6.43,114.19
  pour Top (rank 3): 6.68,112.27 6.65,112.27 6.62,112.29 6.51,112.38 6.43,112.38 6.43,112.12 6.69,112.12 6.69,112.26
  pour Top (rank 3): 6.38,112.1 6.43,112.06 6.43,112.12 6.36,112.12
  pour Top (rank 3): 4.8,113.92 4.79,113.89 4.78,113.87 4.75,113.84 4.73,113.83 4.72,113.82 4.7,113.82 4.68,113.81 4.65,113.81 4.62,113.82 4.62,113.67 4.88,113.67 4.88,113.93 4.8,113.93
  pour Top (rank 3): 6.17,112.64 6.24,112.64 6.24,112.66 6.24,112.68 6.25,112.71 6.26,112.73 6.28,112.75 6.3,112.76 6.31,112.77 6.34,112.78 6.37,112.78 6.4,112.78 6.43,112.77 6.43,112.89 6.17,112.89
  pour Top (rank 3): 5.6,112.89 5.65,112.81 5.65,112.89 5.59,112.89
  pour Top (rank 3): 4.1,113.93 4.1,113.67 4.36,113.67 4.36,113.93
  pour Top (rank 3): 6.17,112.23 6.22,112.21 6.28,112.18 6.33,112.14 6.36,112.12 6.43,112.12 6.43,112.38 6.17,112.38
  pour Top (rank 3): 4.98,113.67 5.01,113.71 5.04,113.75 5.09,113.8 5.14,113.83 5.14,113.93 4.88,113.93 4.88,113.67
  pour Top (rank 3): 5.14,113.84 5.18,113.87 5.23,113.89 5.27,113.91 5.32,113.93 5.14,113.93 5.14,113.83
  pour Top (rank 3): 6.28,112.55 6.27,112.56 6.25,112.59 6.24,112.61 6.24,112.64 6.17,112.64 6.17,112.38 6.43,112.38 6.43,112.44
  pour Top (rank 3): 6.43,112.38 6.51,112.38 6.43,112.44
  pour Top (rank 3): 5.39,113.15 5.39,113.1 5.46,113.04 5.5,113.01 5.53,112.97 5.59,112.89 5.65,112.89 5.65,113.15
  pour Top (rank 3): 3.07,110.83 3.07,110.57 3.33,110.57 3.33,110.83
  pour Top (rank 3): 3.84,113.93 3.84,113.67 4.1,113.67 4.1,113.93
  pour Top (rank 3): 3.65,112.64 3.67,112.68 3.71,112.77 3.73,112.81 3.79,112.89 3.79,112.89 3.58,112.89 3.58,112.64 3.64,112.64
  pour Top (rank 3): 4.08,113.17 4.1,113.18 4.1,113.41 3.84,113.41 3.84,113.15 4.06,113.15
  pour Top (rank 3): 4.41,113.32 4.51,113.34 4.55,113.34 4.62,113.35 4.62,113.41 4.36,113.41 4.36,113.3
  pour Top (rank 3): 3.91,113.02 3.97,113.09 4.01,113.11 4.06,113.15 3.84,113.15 3.84,112.96
  pour Top (rank 3): 5.65,112.89 5.87,112.89 5.86,112.93 5.81,113 5.76,113.06 5.71,113.13 5.68,113.15 5.65,113.15
  pour Top (rank 3): 5.59,113.24 5.52,113.3 5.46,113.35 5.39,113.39 5.39,113.15 5.65,113.15 5.65,113.18
  pour Top (rank 3): 5.68,113.15 5.65,113.18 5.65,113.15
  pour Top (rank 3): 4.91,113.33 4.96,113.32 5.01,113.31 5.06,113.29 5.13,113.26 5.14,113.41 4.88,113.41 4.88,113.34
  pour Top (rank 3): 5.16,113.25 5.21,113.23 5.25,113.2 5.33,113.15 5.39,113.15 5.39,113.39 5.35,113.41 5.14,113.41 5.14,113.26
  pour Top (rank 3): 4.65,113.35 4.69,113.35 4.75,113.35 4.8,113.35 4.88,113.34 4.88,113.41 4.62,113.41 4.62,113.35
  pour Top (rank 3): 3.84,113.67 3.84,113.41 4.1,113.41 4.1,113.67
  pour Top (rank 3): 6.08,113.65 6.11,113.61 6.13,113.56 6.15,113.51 6.17,113.45 6.17,113.67 6.07,113.67
  pour Top (rank 3): 3.84,114.19 3.84,113.93 4.1,113.93 4.1,114.19
  pour Top (rank 3): 4.36,113.93 4.36,113.94 4.23,114 4.2,114.02 4.19,114.03 4.16,114.06 4.16,114.08 4.15,114.1 4.14,114.13 4.14,114.14 4.14,114.17 4.14,114.19 4.1,114.19 4.1,113.93
  pour Top (rank 3): 5.75,113.92 5.82,113.89 5.87,113.86 5.91,113.84 5.91,113.93 5.73,113.93
  pour Top (rank 3): 5.83,112.34 5.84,112.28 5.91,112.28 5.91,112.38 5.82,112.38
  pour Top (rank 3): 5.93,113.82 5.97,113.79 6,113.75 6.04,113.72 6.07,113.67 6.17,113.67 6.17,113.93 5.91,113.93 5.91,113.84
  pour Top (rank 3): 3.58,113.41 3.59,113.15 3.84,113.15 3.84,113.41
  pour Top (rank 3): 3.81,112.92 3.84,112.96 3.84,113.15 3.58,113.15 3.58,112.89 3.79,112.89
  pour Top (rank 3): 3.58,113.93 3.59,113.67 3.84,113.67 3.84,113.93
  pour Top (rank 3): 3.58,113.67 3.59,113.41 3.84,113.41 3.84,113.67
  pour Top (rank 3): 3.58,114.19 3.59,113.93 3.84,113.93 3.84,114.19
  pour Top (rank 3): 5.32,113.93 5.39,113.95 5.39,114.12 5.36,114.12 5.34,114.13 5.32,114.14 5.3,114.15 5.28,114.16 5.26,114.19 5.14,114.19 5.14,113.93
  pour Top (rank 3): 6.25,114 6.23,113.99 6.21,113.97 6.19,113.97 6.17,113.96 6.17,113.93 6.43,113.93 6.43,114.19 6.39,114.19
  pour Top (rank 3): 6.17,113.93 6.17,113.67 6.43,113.67 6.43,113.93
  pour Top (rank 3): 6.18,113.39 6.19,113.34 6.19,113.29 6.18,113.21 6.17,113.15 6.43,113.15 6.43,113.41 6.18,113.41 6.18,113.41
  pour Top (rank 3): 6.17,113.93 6.17,113.96 6.13,113.96 6.11,113.97 6.1,113.98 6.08,113.99 6.06,114.01 6.06,114.02 6.05,114.04 6.04,114.05 6.04,114.07 6.04,114.08 6.04,114.11 6.05,114.12 6.08,114.19 5.91,114.19 5.91,113.93
  pour Top (rank 3): 6.17,113.45 6.18,113.41 6.43,113.41 6.43,113.67 6.17,113.67
  pour Top (rank 3): 4.62,114.19 4.57,114.19 4.62,114.15
  pour Top (rank 3): 4.88,114.19 4.88,113.93 5.13,113.93 5.13,114.19
  pour Top (rank 3): 4.75,114.05 4.76,114.04 4.78,114.02 4.79,113.99 4.8,113.96 4.8,113.95 4.8,113.93 4.88,113.93 4.88,114.19 4.62,114.19 4.62,114.15
  pour Top (rank 3): 5.65,113.95 5.73,113.93 5.91,113.93 5.91,114.19 5.65,114.19 5.65,113.95
  pour Top (rank 3): 6.17,113.14 6.17,112.89 6.43,112.89 6.43,113.15 6.17,113.15
  pour Top (rank 3): 5.49,114.18 5.47,114.15 5.44,114.14 5.42,114.13 5.39,114.12 5.39,113.95 5.45,113.96 5.52,113.96 5.55,113.96 5.6,113.96 5.65,113.95 5.65,114.19 5.49,114.19
  pour Top (rank 3): 4.62,113.67 4.62,113.82 4.38,113.93 4.36,113.93 4.36,113.67
  pour Top (rank 3): 5.65,114.7 5.65,114.44 5.91,114.44 5.91,114.7
  pour Top (rank 3): 7.46,111.6 7.46,111.34 7.72,111.34 7.72,111.6
  pour Top (rank 3): 5.91,114.7 5.91,114.44 6.17,114.44 6.17,114.7
  pour Top (rank 3): 8.33,110.27 8.36,110.31 8.24,110.31 8.24,110.14
  pour Top (rank 3): 6.21,114.45 6.25,114.54 6.27,114.56 6.29,114.58 6.32,114.6 6.35,114.61 6.39,114.62 6.41,114.61 6.43,114.61 6.43,114.7 6.17,114.7 6.17,114.45
  pour Top (rank 3): 6.43,114.61 6.46,114.6 6.49,114.59 6.5,114.57 6.52,114.55 6.54,114.53 6.55,114.5 6.55,114.48 6.56,114.45 6.69,114.45 6.69,114.7 6.43,114.7 6.43,114.61
  pour Top (rank 3): 8.24,111.86 8.24,111.6 8.49,111.6 8.5,111.86
  pour Top (rank 3): 5.14,114.45 5.14,114.51 5.1,114.59 5.09,114.63 5.09,114.65 5.09,114.67 5.1,114.7 4.88,114.7 4.88,114.45
  pour Top (rank 3): 6.8,112.6 6.83,112.58 6.86,112.56 6.87,112.53 6.89,112.5 6.9,112.47 6.9,112.43 6.89,112.41 6.89,112.38 6.94,112.38 6.94,112.64 6.72,112.64
  pour Top (rank 3): 8.24,110.83 8.24,110.57 8.49,110.57 8.5,110.83
  pour Top (rank 3): 6.69,114.7 6.69,114.44 6.94,114.44 6.94,114.7
  pour Top (rank 3): 8.24,113.41 8.24,113.15 8.49,113.15 8.5,113.41
  pour Top (rank 3): 6.69,112.65 6.72,112.64 6.94,112.64 6.94,112.89 6.69,112.89
  pour Top (rank 3): 4.1,109.28 4.1,109.02 4.36,109.02 4.36,109.27
  pour Top (rank 3): 6.69,113.15 6.94,113.15 6.94,113.34 6.69,113.32
  pour Top (rank 3): 3.07,109.28 3.07,109.02 3.33,109.02 3.33,109.27
  pour Top (rank 3): 4.62,114.7 4.62,114.44 4.88,114.44 4.88,114.7
  pour Top (rank 3): 6.69,113.15 6.69,112.89 6.94,112.89 6.94,113.15
  pour Top (rank 3): 5.65,109.28 5.65,109.02 5.91,109.02 5.91,109.27
  pour Top (rank 3): 6.69,113.67 6.87,113.67 6.94,113.7 6.94,113.93 6.69,113.93
  pour Top (rank 3): 6.69,114.19 6.69,113.93 6.94,113.93 6.94,114.19
  pour Top (rank 3): 7.2,109.16 7.25,109.18 7.37,109.28 7.2,109.27
  pour Top (rank 3): 6.69,114.45 6.69,114.19 6.94,114.19 6.94,114.44
  pour Top (rank 3): 6.69,109.28 6.69,109.02 6.94,109.02 6.94,109.27
  pour Top (rank 3): 8.24,114.45 8.24,114.19 8.49,114.19 8.5,114.44
  pour Top (rank 3): 4.36,114.7 4.36,114.44 4.62,114.44 4.62,114.7
  pour Top (rank 3): 1.52,114.45 1.52,114.19 1.77,114.19 1.78,114.44
  pour Top (rank 3): 8.36,114.7 8.33,114.75 8.24,114.88 8.24,114.7
  pour Top (rank 3): 3.11,112.27 3.16,112.32 3.19,112.34 3.24,112.38 3.07,112.38 3.07,112.23
  pour Top (rank 3): 3.25,112.38 3.28,112.4 3.33,112.43 3.33,112.64 3.07,112.64 3.07,112.38 3.24,112.38
  pour Top (rank 3): 3.17,111.1 3.11,111.15 3.07,111.19 3.07,111.08 3.18,111.08
  pour Top (rank 3): 3.33,111 3.27,111.03 3.24,111.05 3.19,111.08 3.07,111.08 3.07,110.83 3.33,110.83
  pour Top (rank 3): 3.07,112.89 3.07,112.64 3.33,112.64 3.33,112.89
  pour Top (rank 3): 1.52,110.83 1.52,110.57 1.77,110.57 1.78,110.83
  pour Top (rank 3): 1.66,110.31 1.68,110.27 1.78,110.14 1.78,110.31
  pour Top (rank 3): 9.01,112.51 9.01,112.55 9.01,112.46
  pour Top (rank 3): 1.68,114.75 1.66,114.7 1.78,114.7 1.78,114.87
  pour Top (rank 3): 3.33,114.7 3.33,114.44 3.58,114.44 3.58,114.7
  pour Top (rank 3): 3.58,114.7 3.59,114.44 3.84,114.44 3.84,114.7
  pour Top (rank 3): 3.07,114.7 3.07,114.44 3.33,114.44 3.33,114.7
  pour Top (rank 3): 4.1,114.7 4.1,114.44 4.36,114.44 4.36,114.7
  pour Top (rank 3): 3.07,113.15 3.07,112.89 3.33,112.89 3.33,113.15
  pour Top (rank 3): 3.84,114.7 3.84,114.44 4.1,114.44 4.1,114.7
  pour Top (rank 3): 3.07,113.67 3.07,113.41 3.33,113.41 3.33,113.67
  pour Top (rank 3): 3.07,113.41 3.07,113.15 3.33,113.15 3.33,113.41
  pour Top (rank 3): 5.26,114.19 5.26,114.2 5.16,114.45 5.14,114.45 5.14,114.19
  pour Top (rank 3): 3.07,114.19 3.07,113.93 3.33,113.93 3.33,114.19
  pour Top (rank 3): 3.07,114.45 3.07,114.19 3.33,114.19 3.33,114.44
  pour Top (rank 3): 3.07,113.93 3.07,113.67 3.33,113.67 3.33,113.93
  pour Top (rank 3): 2.06,109.79 2.17,109.67 2.29,109.56 2.29,109.79
  pour Top (rank 3): 7.46,109.34 7.55,109.41 7.69,109.53 7.46,109.53
  pour Top (rank 3): 2.46,109.41 2.55,109.34 2.55,109.53 2.32,109.53
  pour Top (rank 3): 3.38,112.45 3.41,112.46 3.48,112.49 3.52,112.49 3.58,112.5 3.58,112.63 3.33,112.64 3.33,112.43
  pour Top (rank 3): 2.17,115.34 2.06,115.22 2.29,115.22 2.29,115.45
  pour Top (rank 3): 8.1,109.96 8.17,110.05 7.98,110.05 7.98,109.82
  pour Top (rank 3): 5.65,116 5.65,115.74 5.91,115.74 5.91,116
  pour Top (rank 3): 3.33,112.89 3.33,112.64 3.58,112.64 3.58,112.89
  pour Top (rank 3): 6.69,116 6.69,115.74 6.94,115.74 6.94,116
  pour Top (rank 3): 7.25,115.83 7.2,115.86 7.2,115.86 7.2,115.74 7.37,115.74
  pour Top (rank 3): 8.17,114.96 8.1,115.06 7.98,115.19 7.98,114.96
  pour Top (rank 3): 4.88,114.45 4.88,114.19 5.13,114.19 5.13,114.44
  pour Top (rank 3): 4.14,114.19 4.15,114.22 4.17,114.25 4.19,114.28 4.22,114.3 4.25,114.32 4.28,114.33 4.31,114.33 4.33,114.33 4.36,114.33 4.36,114.44 4.1,114.44 4.1,114.19
  pour Top (rank 3): 3.33,113.15 3.33,112.89 3.58,112.89 3.58,113.15
  pour Top (rank 3): 4.62,114.45 4.62,114.19 4.88,114.19 4.88,114.44
  pour Top (rank 3): 3.84,114.45 3.84,114.19 4.1,114.19 4.1,114.44
  pour Top (rank 3): 3.58,110.92 3.53,110.93 3.45,110.95 3.38,110.98 3.33,111 3.33,110.83 3.58,110.83
  pour Top (rank 3): 4.36,114.33 4.39,114.32 4.42,114.3 4.57,114.19 4.62,114.19 4.62,114.45 4.36,114.45
  pour Top (rank 3): 3.33,113.41 3.33,113.15 3.58,113.15 3.58,113.41
  pour Top (rank 3): 3.33,113.67 3.33,113.41 3.58,113.41 3.58,113.67
  pour Top (rank 3): 3.33,114.19 3.33,113.93 3.58,113.93 3.58,114.19
  pour Top (rank 3): 3.33,113.93 3.33,113.67 3.58,113.67 3.58,113.93
  pour Top (rank 3): 3.33,114.45 3.33,114.19 3.58,114.19 3.58,114.44
  pour Top (rank 3): 4.36,110.83 4.36,110.57 4.62,110.57 4.62,110.83
  pour Top (rank 3): 2.81,115.86 2.77,115.83 2.64,115.74 2.81,115.74
  pour Top (rank 3): 4.1,116 4.1,115.74 4.36,115.74 4.36,116
  pour Top (rank 3): 3.07,116 3.07,115.74 3.33,115.74 3.33,116
  pour Top (rank 3): 6.43,110.83 6.43,110.57 6.69,110.57 6.69,110.83
  pour Top (rank 3): 3.33,110.83 3.33,110.57 3.58,110.57 3.58,110.83
  pour Top (rank 3): 6.69,110.83 6.69,110.57 6.94,110.57 6.94,110.83
  pour Top (rank 3): 6.69,112.12 6.69,111.86 6.94,111.86 6.94,112.12
  pour Top (rank 3): 6.69,111.71 6.71,111.71 6.76,111.71 6.82,111.69 6.86,111.67 6.89,111.66 6.91,111.64 6.94,111.62 6.94,111.86 6.69,111.86
  pour Top (rank 3): 2.77,109.18 2.81,109.16 2.81,109.27 2.81,109.28 2.64,109.28
  pour Top (rank 3): 1.84,110.05 1.92,109.96 2.03,109.82 2.03,110.05
  pour Top (rank 3): 1.91,115.06 1.84,114.96 2.03,114.96 2.03,115.19
  pour Top (rank 3): 6.91,110.98 6.86,110.95 6.81,110.93 6.76,110.92 6.74,110.92 6.71,110.91 6.69,110.91 6.69,110.83 6.94,110.83 6.94,111.01
  pour Top (rank 3): 6.89,112.37 6.87,112.35 6.86,112.33 6.84,112.31 6.81,112.29 6.78,112.27 6.75,112.26 6.72,112.26 6.69,112.26 6.69,112.12 6.94,112.12 6.94,112.38 6.94,112.38 6.89,112.38
  pour Top (rank 3): 4.1,110.83 4.1,110.57 4.36,110.57 4.36,110.83
  pour Top (rank 3): 3.58,110.83 3.59,110.57 3.84,110.57 3.84,110.83
  pour Top (rank 3): 4.62,110.83 4.62,110.57 4.88,110.57 4.88,110.83
  pour Top (rank 3): 3.84,110.83 3.84,110.57 4.1,110.57 4.1,110.83
  pour Top (rank 3): 5.39,110.83 5.39,110.57 5.65,110.57 5.65,110.83
  pour Top (rank 3): 5.65,110.83 5.65,110.57 5.91,110.57 5.91,110.83
  pour Top (rank 3): 5.91,110.83 5.91,110.57 6.17,110.57 6.17,110.83
  pour Top (rank 3): 5.14,110.83 5.14,110.57 5.39,110.57 5.39,110.83
  pour Top (rank 3): 4.88,110.83 4.88,110.57 5.13,110.57 5.13,110.83
  pour Top (rank 3): 6.17,110.83 6.17,110.57 6.43,110.57 6.43,110.83
  pour Top (rank 3): 3.58,114.45 3.59,114.19 3.84,114.19 3.84,114.44
  pour Top (rank 3): 5.39,109.28 5.39,109.02 5.65,109.02 5.65,109.27
  pour Top (rank 3): 5.14,109.28 5.14,109.02 5.39,109.02 5.39,109.27
  pour Top (rank 3): 5.39,109.02 5.39,108.76 5.65,108.76 5.65,109.02
  pour Top (rank 3): 4.36,109.28 4.36,109.02 4.62,109.02 4.62,109.27
  pour Top (rank 3): 4.62,109.28 4.62,109.02 4.88,109.02 4.88,109.27
  pour Top (rank 3): 4.88,109.28 4.88,109.02 5.13,109.02 5.13,109.27
  pour Top (rank 3): 6.17,109.28 6.17,109.02 6.43,109.02 6.43,109.27
  pour Top (rank 3): 6.43,109.28 6.43,109.02 6.69,109.02 6.69,109.27
  pour Top (rank 3): 5.91,109.02 5.91,108.76 6.17,108.76 6.17,109.02
  pour Top (rank 3): 5.91,109.28 5.91,109.02 6.17,109.02 6.17,109.27
  pour Top (rank 3): 5.65,109.02 5.65,108.76 5.91,108.76 5.91,109.02
  pour Top (rank 3): 3.07,109.28 2.81,109.27 2.81,109.16 2.93,109.08 3.04,109.02 3.07,109.02
  pour Top (rank 3): 3.07,109.02 3.07,109 3.1,108.98 3.27,108.9 3.33,108.87 3.33,109.02 3.32,109.02
  pour Top (rank 3): 3.33,108.87 3.45,108.81 3.58,108.76 3.58,109.02 3.33,109.02
  pour Top (rank 3): 3.04,109.02 3.07,109 3.07,109.02
  pour Top (rank 3): 3.33,109.28 3.33,109.02 3.58,109.02 3.58,109.27
  pour Top (rank 3): 6.43,109.02 6.43,108.76 6.57,108.82 6.69,108.87 6.69,109.02
  pour Top (rank 3): 4.1,109.02 4.1,108.76 4.36,108.76 4.36,109.02
  pour Top (rank 3): 6.94,115.74 7.2,115.74 7.2,115.86 7.08,115.93 6.98,116 6.94,116
  pour Top (rank 3): 3.84,109.02 3.84,108.76 4.1,108.76 4.1,109.02
  pour Top (rank 3): 3.84,109.28 3.84,109.02 4.1,109.02 4.1,109.27
  pour Top (rank 3): 3.58,109.28 3.59,109.02 3.84,109.02 3.84,109.27
  pour Top (rank 3): 8.64,110.83 8.7,110.95 8.75,111.08 8.5,111.08 8.5,110.83
  pour Top (rank 3): 8.24,112.64 8.24,112.38 8.49,112.38 8.5,112.64
  pour Top (rank 3): 8.24,112.38 8.24,112.12 8.49,112.12 8.5,112.38
  pour Top (rank 3): 8.24,112.12 8.24,111.86 8.49,111.86 8.5,112.12
  pour Top (rank 3): 8.5,112.12 8.5,111.86 8.75,111.86 8.75,112.12
  pour Top (rank 3): 8.24,112.89 8.24,112.64 8.49,112.64 8.5,112.89
  pour Top (rank 3): 8.24,113.15 8.24,112.89 8.49,112.89 8.5,113.15
  pour Top (rank 3): 8.5,113.67 8.5,113.41 8.75,113.41 8.75,113.67
  pour Top (rank 3): 8.24,113.67 8.24,113.41 8.49,113.41 8.5,113.67
  pour Top (rank 3): 8.5,113.41 8.5,113.15 8.75,113.15 8.75,113.41
  pour Top (rank 3): 8.5,111.86 8.5,111.6 8.75,111.6 8.75,111.86
  pour Top (rank 3): 8.5,113.15 8.5,112.89 8.75,112.89 8.75,113.15
  pour Top (rank 3): 1.84,110.05 2.03,110.05 2.03,110.31 1.78,110.31 1.78,110.14 1.8,110.11
  pour Top (rank 3): 8.5,111.6 8.5,111.34 8.75,111.34 8.75,111.6
  pour Top (rank 3): 8.5,110.54 8.51,110.57 8.5,110.57 8.5,110.57
  pour Top (rank 3): 8.24,110.57 8.24,110.31 8.36,110.31 8.43,110.43 8.49,110.54 8.5,110.57
  pour Top (rank 3): 7.2,109.16 7.2,109.27 6.94,109.28 6.94,109.02 6.98,109.02 7.08,109.08
  pour Top (rank 3): 6.94,109 6.97,109.02 6.94,109.02
  pour Top (rank 3): 8.5,110.57 8.51,110.57 8.53,110.6 8.62,110.77 8.64,110.83 8.5,110.83
  pour Top (rank 3): 8.24,111.6 8.24,111.34 8.49,111.34 8.5,111.6
  pour Top (rank 3): 8.24,111.34 8.24,111.08 8.49,111.08 8.5,111.34
  pour Top (rank 3): 8.24,111.08 8.24,110.83 8.49,110.83 8.5,111.08
  pour Top (rank 3): 6.69,109.02 6.69,108.87 6.74,108.9 6.92,108.98 6.94,109 6.94,109.02 6.94,109.02
  pour Top (rank 3): 1.78,111.86 1.78,111.6 2.03,111.6 2.03,111.86
  pour Top (rank 3): 5.14,116 5.14,115.74 5.39,115.74 5.39,116
  pour Top (rank 3): 4.1,116.25 4.1,116 4.36,116 4.36,116.25
  pour Top (rank 3): 4.36,116 4.36,115.74 4.62,115.74 4.62,116
  pour Top (rank 3): 4.88,116 4.88,115.74 5.13,115.74 5.13,116
  pour Top (rank 3): 4.62,116 4.62,115.74 4.88,115.74 4.88,116
  pour Top (rank 3): 4.36,116.25 4.36,116 4.62,116 4.62,116.25
  pour Top (rank 3): 3.33,116 3.33,116.14 3.27,116.12 3.1,116.03 3.07,116.01 3.07,116 3.07,116
  pour Top (rank 3): 1.78,110.57 1.78,110.31 2.03,110.31 2.03,110.57
  pour Top (rank 3): 3.33,116 3.33,115.74 3.58,115.74 3.58,116
  pour Top (rank 3): 3.58,116 3.59,115.74 3.84,115.74 3.84,116
  pour Top (rank 3): 3.84,116 3.84,115.74 4.1,115.74 4.1,116
  pour Top (rank 3): 3.84,116.25 3.84,116 4.1,116 4.1,116.25
  pour Top (rank 3): 6.17,116 6.17,115.74 6.43,115.74 6.43,116
  pour Top (rank 3): 6.69,116.14 6.57,116.2 6.43,116.25 6.43,116 6.69,116
  pour Top (rank 3): 5.39,116 5.39,115.74 5.65,115.74 5.65,116
  pour Top (rank 3): 6.94,116 6.94,116.01 6.74,116.12 6.69,116.14 6.69,116
  pour Top (rank 3): 6.97,116 6.95,116.01 6.94,116.01 6.94,116
  pour Top (rank 3): 6.43,116 6.43,115.74 6.69,115.74 6.69,116
  pour Top (rank 3): 5.65,116.25 5.65,116 5.91,116 5.91,116.25
  pour Top (rank 3): 5.39,116.25 5.39,116 5.65,116 5.65,116.25
  pour Top (rank 3): 5.91,116 5.91,115.74 6.17,115.74 6.17,116
  pour Top (rank 3): 5.91,116.25 5.91,116 6.17,116 6.17,116.25
  pour Top (rank 3): 3.58,116 3.58,116.25 3.45,116.2 3.33,116.14 3.33,116
  pour Top (rank 3): 1.52,112.12 1.52,111.86 1.77,111.86 1.78,112.12
  pour Top (rank 3): 1.52,111.86 1.52,111.6 1.77,111.6 1.78,111.86
  pour Top (rank 3): 1.52,112.38 1.52,112.12 1.77,112.12 1.78,112.38
  pour Top (rank 3): 1.52,112.64 1.52,112.38 1.77,112.38 1.78,112.64
  pour Top (rank 3): 8.24,113.93 8.24,113.67 8.49,113.67 8.5,113.93
  pour Top (rank 3): 1.78,111.34 1.78,111.08 2.03,111.08 2.03,111.34
  pour Top (rank 3): 1.78,110.83 1.78,110.57 2.03,110.57 2.03,110.83